# EAGLE board aurdino 4 (EAGLE 9.7.0)

Size 108.93 x 51.57 mm. Coordinates in mm from the lower left corner, seen from the top.
Outline: 0,0 108.93,0 108.93,51.57 0,51.57 0,0
Copper layers (1*16): Top 0.035mm / dielectric 1.5mm / Bottom 0.035mm
Design rules "default": minimum track width 6mil, minimum drill 0.35mm, track to track 6mil, track to pad 6mil, pad to pad 6mil, via to via 6mil, smd to smd 6mil, copper to edge 40mil, drill to drill 6mil, minimum pad ring 10mil, minimum via ring 8mil, stop-mask expansion 4mil, vias tented up to drill 0mil, thermal gap 10mil

## Footprints (pad centres in the part's own frame; a part is rotated, then mirrored left to right if it is on the bottom)
BATTERY-GENERIC = drill 1.118 pad 3.15 octagon: + 2.54,0; - -2.54,0
SWITCH-SPDT-PTH-8.5X3.7MM = drill 1.016 pad 1.88: 1 -2.54,0; 2 0,0; 3 2.54,0
DIP762W53P254L1969H508Q14B = drill 0.743 pad 1.343: 1 -3.81,7.62; 2 -3.81,5.08; 3 -3.81,2.54; 4 -3.81,0; 5 -3.81,-2.54; 6 -3.81,-5.08; 7 -3.81,-7.62; 8 3.81,-7.62; 9 3.81,-5.08; 10 3.81,-2.54; 11 3.81,0; 12 3.81,2.54; 13 3.81,5.08; 14 3.81,7.62

## Placement (x,y rotation side)
P1  BATTERYGENERIC  [BATTERY-GENERIC]  8.26,43.31 180 top
SA  TOGGLE  [SWITCH-SPDT-PTH-8.5X3.7MM]  101.52,19.84 0 top
SB  TOGGLE  [SWITCH-SPDT-PTH-8.5X3.7MM]  40.56,19.84 0 top
U1  74HC00_PDIP  [DIP762W53P254L1969H508Q14B]  68.5,8.41 90 top

## Library data of the parts
P1 SA SB U1 = Tinkercad

## Nets
P1+: P1.+ SA.1 SB.3 U1.14
P1-: P1.- SA.3 SB.1 U1.7
U1_3A: SA.2 U1.9
U1_3B: SB.2 U1.10

## Tracks (layer width: path | path; a pad name or v marks a point on that pad's centre or on a via)
P1+  (3 unrouted)
P1-  (3 unrouted)
U1_3A  (1 unrouted)
U1_3B  (1 unrouted)